# Altium PCB МПСУ.687251.22-01.PcbDoc
Units mm, origin at the board's own origin, x right, y up, seen from the top; angles counter-clockwise.
Board outline 40 x 41 mm, 2 copper layers (Top Layer, Bottom Layer), stack 2.036 mm thick; 32 components, 38 nets, 165 pads, 155 vias.
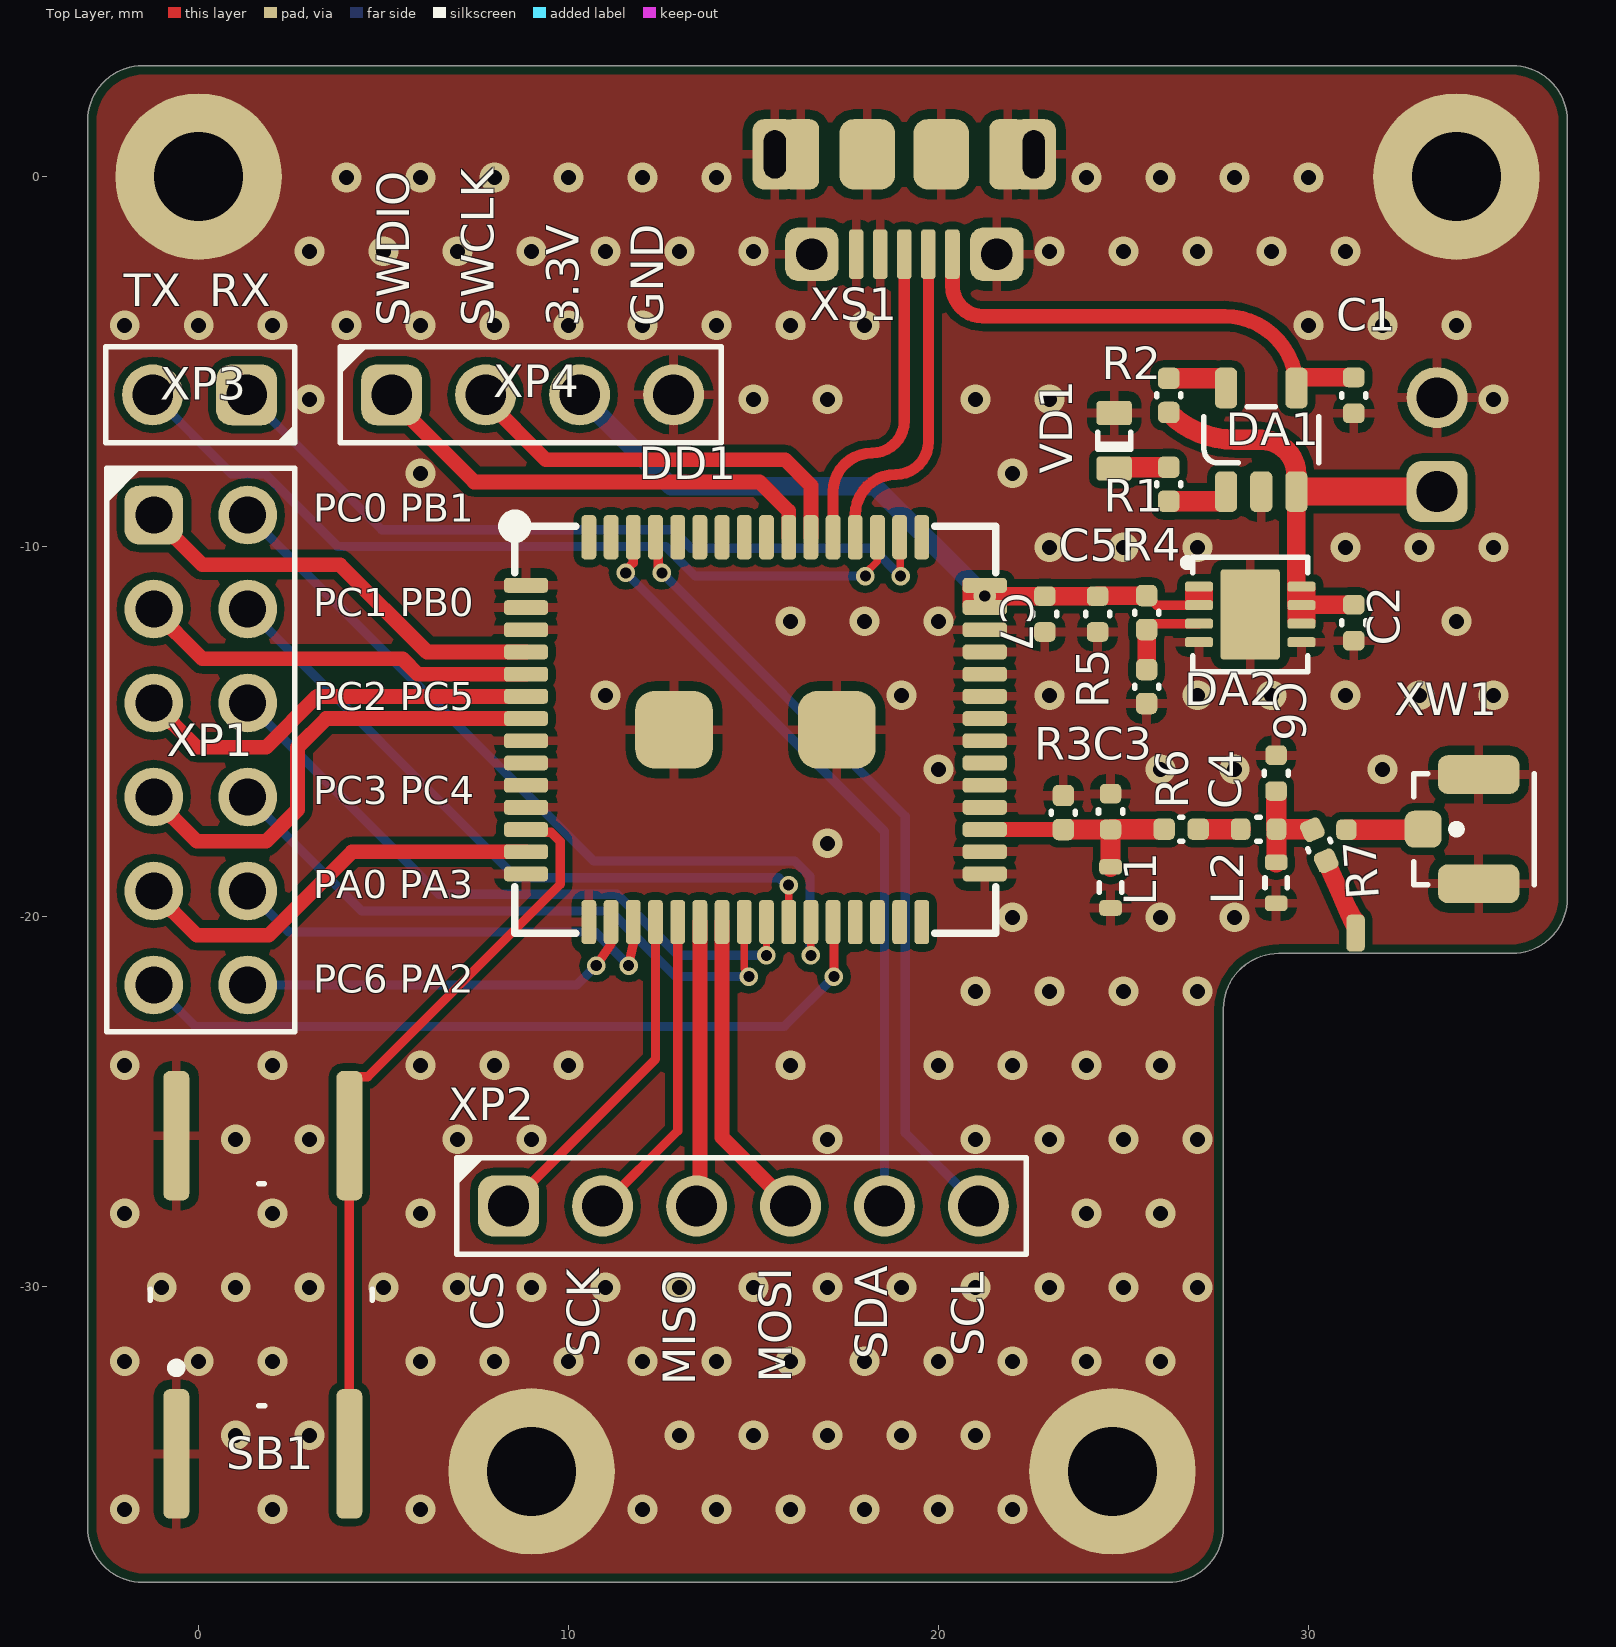
[diagram p0: Top Layer view]
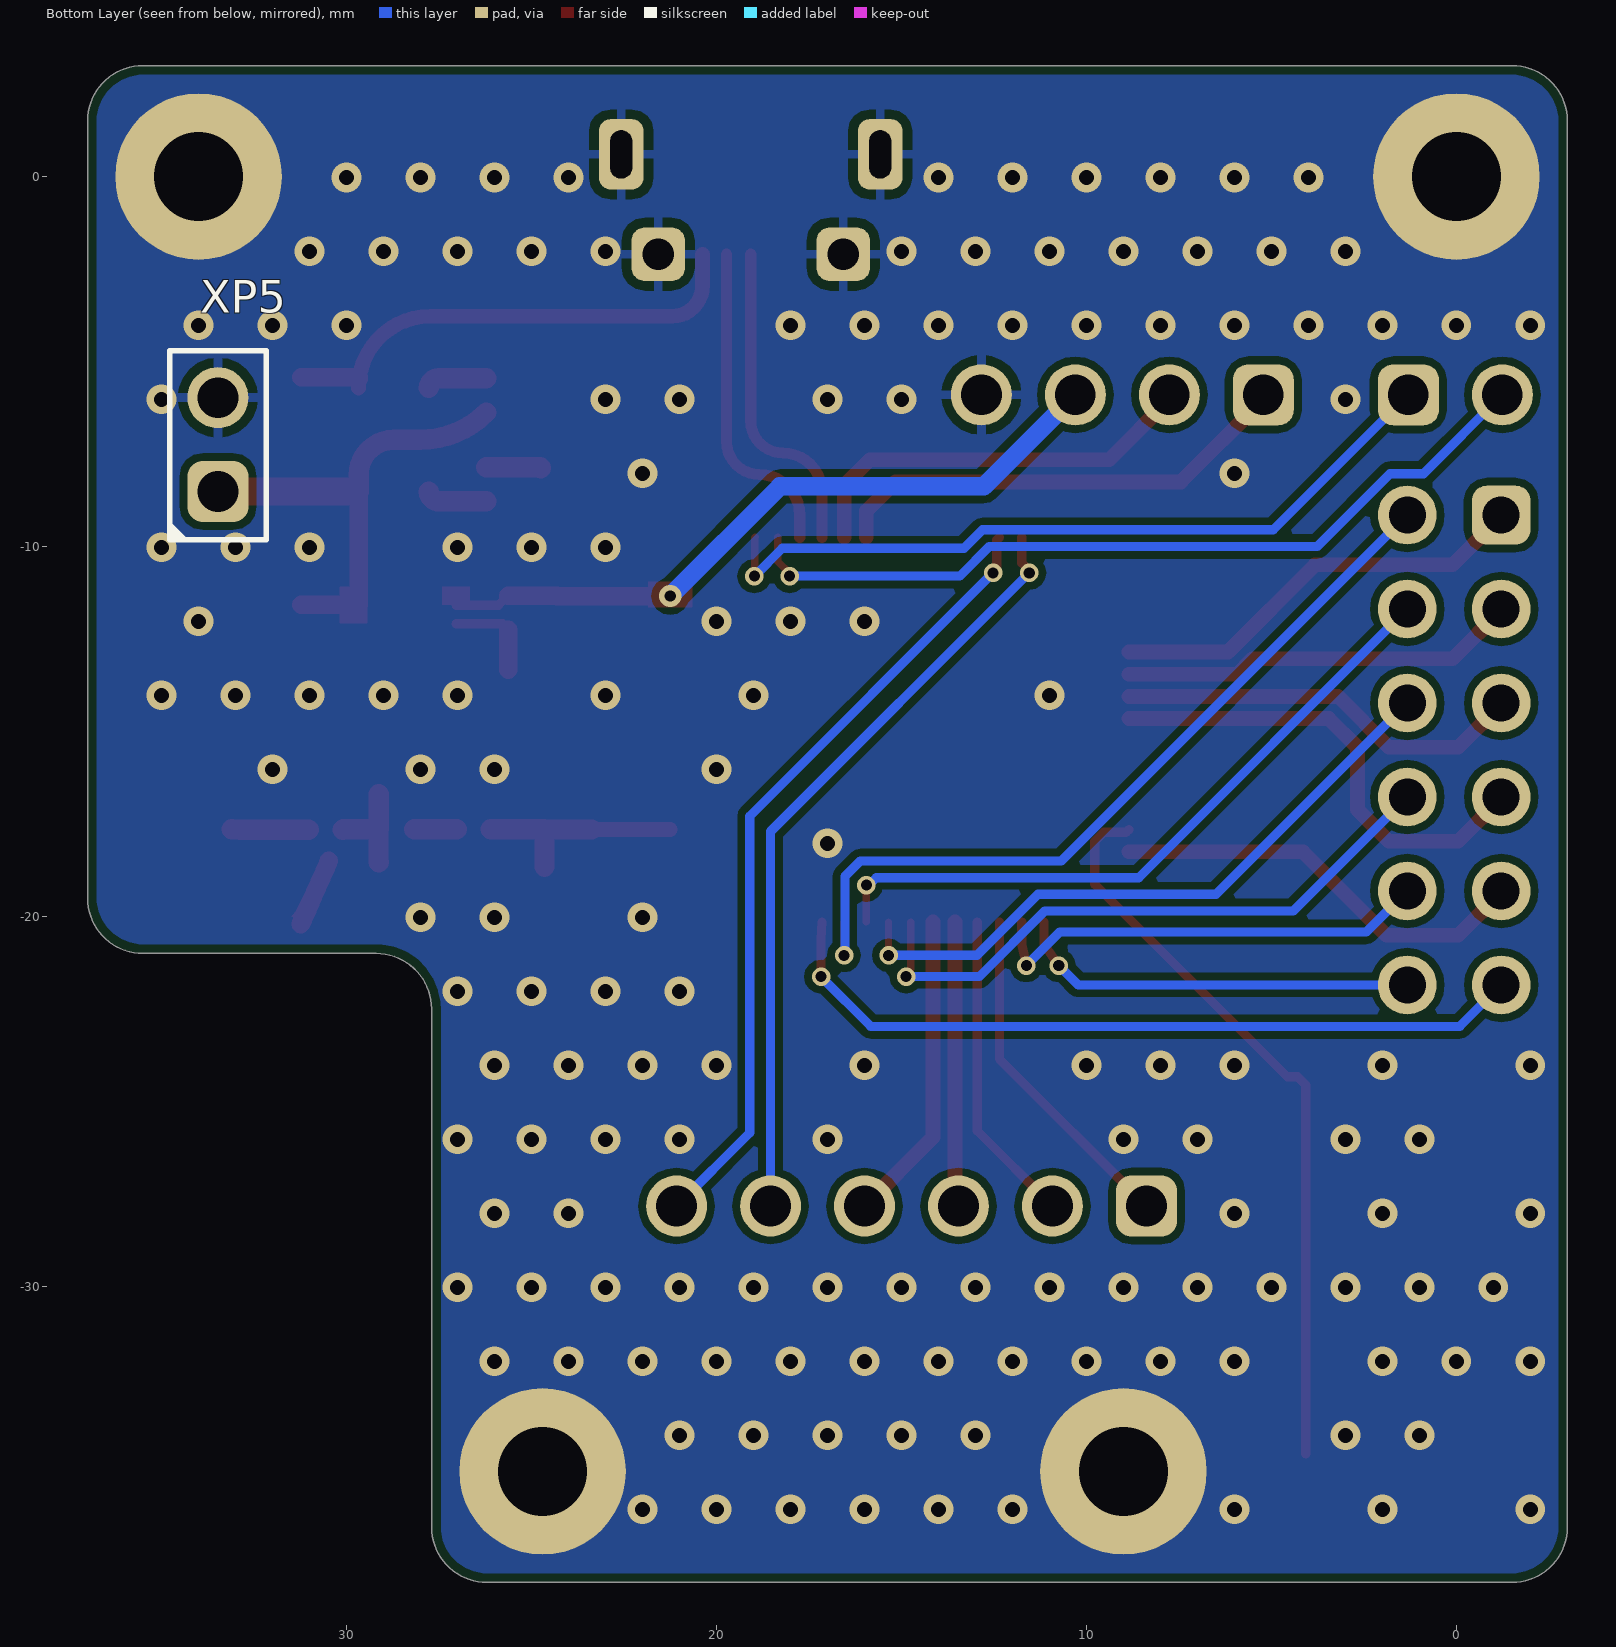
[diagram p1: Bottom Layer view, seen from below]
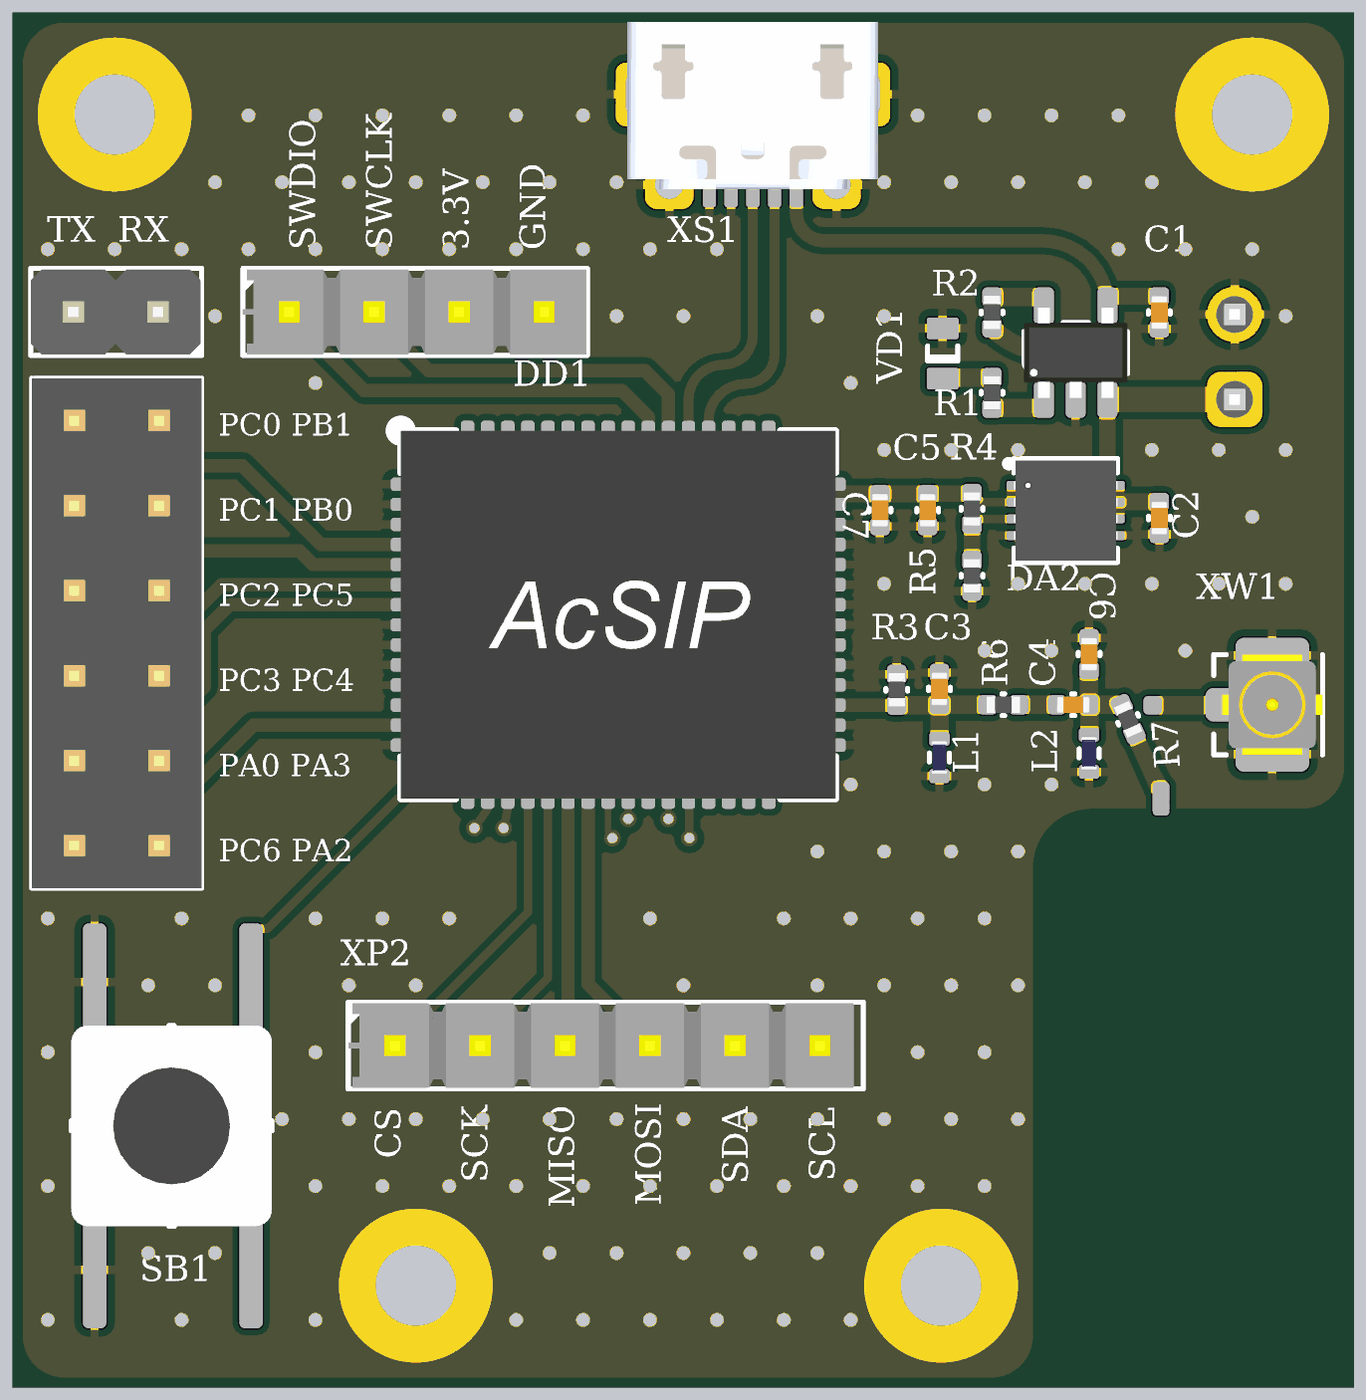
[diagram p2: 3D render of the assembled board from above, using the file's embedded part models]

## Layer stack, top to bottom
Top Solder: solder mask 0.0254, SM-002, Dk 4
Top Layer: signal copper 0.018
Dielectric 1: core 2, FR4, Dk 4.6
Bottom Layer: signal copper 0.018
Bottom Solder: solder mask 0.0254, SM-002, Dk 4

## Board outline
-1.5,-38 cw(c-1.5,-36.5) -3,-36.5 -3,1.5 cw(c-1.5,1.5) -1.5,3 35.5,3 cw(c35.5,1.5) 37,1.5 37,-19.5 cw(c35.5,-19.5) 35.5,-21 29.2,-21 ccw(c29.2,-22.5) 27.7,-22.5 27.7,-36.5 cw(c26.2,-36.5) 26.2,-38

## Design rules (kind name [scope] priority, off if disabled: settings)
BoardOutlineClearance SolderMask [OnSolderMask] p1: gap=0 ignorepadtopadclearanceinfootprint=FALSE except(0.25: Arc-CavityEdge Arc-SplitContinuation Track-CavityEdge Track-SplitContinuation SMDPad-CavityEdge SMDPad-SplitContinuation THPad-CavityEdge THPad-SplitContinuation Via-CavityEdge Via-SplitContinuation Fill-CavityEdge Fill-SplitContinuation Poly-CavityEdge Poly-SplitContinuation Region-CavityEdge Region-SplitContinuation Text-CavityEdge Text-SplitContinuation)
BoardOutlineClearance [All] p2: gap=0.25 ignorepadtopadclearanceinfootprint=FALSE
Clearance [All] p1: gap=0.2 ignorepadtopadclearanceinfootprint=FALSE
ComponentClearance [All] p1 off: gap=0.25 collisioncheckmode=3 verticalgap=0.25 showdistances=FALSE
DiffPairsRouting [All] p1: maxlimit=0.25 minlimit=0.25 mostfreqgap=0.25 toplayer_minwidth=0.2 toplayer_maxwidth=1 toplayer_prefwidth=0.4 bottomlayer_minwidth=0.2 bottomlayer_maxwidth=1 bottomlayer_prefwidth=0.4 maxuncoupledlength=10
HoleSize [All] p1: absolutevalues=TRUE maxlimit=8 minlimit=0.3 maxpercent=80.000 minpercent=20.000
HoleToHoleClearance [All] p1: gap=0.3 allowstackedmicrovias=TRUE
MinimumSolderMaskSliver [All] p1: minsoldermaskwidth=0.15
PlaneClearance [All] p1: clearance=0.5
PlaneConnect [All] p1: planeconnectstyle=Relief reliefexpansion=0.5 reliefentries=4 reliefconductorwidth=0.25 reliefairgap=0.25
PolygonConnect [All] p1: thpad.connectstyle=Relief thpad.reliefconductorwidth=0.25 thpad.reliefentries=4 thpad.polygonreliefangle="90 Angle" thpad.airgapwidth=0.25 smdpad.connectstyle=Relief smdpad.reliefconductorwidth=0.25 smdpad.reliefentries=4 smdpad.polygonreliefangle="90 Angle" smdpad.airgapwidth=0.25 via.connectstyle=Direct via.reliefconductorwidth=0.25 via.reliefentries=4 via.polygonreliefangle="90 Angle" via.airgapwidth=0.25
ReturnPath [All] p1: impedanceprofileid={2CF304FD-49DA-4276-8468-CD12DB598121} _gaplimit=0.5
RoutingCorners [All] p1: cornerstyle=45-Degree minsetback=2.5 maxsetback=2.5
RoutingVias [All] p1: holewidth=0.3 width=0.5 viastyle="Through Hole" minholewidth=0.3 minwidth=0.5 maxholewidth=1 maxwidth=1.5
SilkToSilkClearance [All] p1: silktosilkclearance=0.05
SilkToSolderMaskClearance [IsPad] p1: minsilkscreentomaskgap=0.05 clearancetoexposedcopper=TRUE
SolderMaskExpansion [All] p1: expansion=0.05 istentingtop=FALSE
UnRoutedNet [All] p1: checkbadconnections=TRUE
Width [All] p1: maxlimit=3 minlimit=0.2 preferedwidth=0.25
19 further rules are at their usual default settings.

## Classes and differential pairs
component class "МПСУ.464414.22-01 Sheet1": C1 C2 C3 C4 C5 C6 C7 DA1 DA2 DD1 L1 L2 R1 R2 R3 R4 R5 R6 R7 SB1 VD1 XP1 XP2 XP3 XP4 XP5 XS1 XW1

## Components (designator, comment, footprint, x,y, rotation, side; value= is the part's Value field where it differs from the comment)
C1 "100 мкФ ± 0 % 0 В  0402" CAPC100X50X55L20N 31.224,-5.916 r90 top value="100 мкФ"
C2 "100 мкФ ± 0 % 0 В  0402" CAPC100X50X55L20N 31.225,-12.06 r270 top value="100 мкФ"
C3 "TBD ± 0 % 0 В  0402" CAPC100X50X55L20N 24.65,-17.165 r90 top value=TBD
C4 "56мкФ ± 0 % 0 В  0402" CAPC100X50X55L20N 28.65,-17.64 r180 top value=56мкФ
C5 "100 мкФ ± 0 % 0 В  0402" CAPC100X50X55L20N 24.3,-11.825 r90 top value="100 мкФ"
C6 "TBD ± 0 % 0 В  0402" CAPC100X50X55L20N 29.125,-16.125 r90 top value=TBD
C7 "0.1 мкФ ± 0 % 0 В  0402" CAPC100X50X55L20N 22.875,-11.825 r270 top value="0.1 мкФ"
DA1 "MCP73831T-2ACI/OT" SOTFL95P270X145-5N 28.724,-7.116 r90 top
DA2 "LT1965*DD" SON9P50_300X300X80L40X25T244X160N 28.425,-11.835 r270 top
DD1 "" S7XS 15.05,-14.95 r0 top
L1 "TBD ± 0 % 0 А 0402" INDC100X50X60L10N 24.65,-19.215 r270 top value=TBD
L2 "TBD ± 0 % 0 А 0402" INDC100X50X60L10N 29.125,-19.09 r270 top value=TBD
R1 "470 Ом ± 0 % 0 Вт 0402" RESC100X50X40L25N 26.224,-8.316 r90 top value="470 Ом"
R2 "5 кОм ± 0 % 0 Вт 0402" RESC100X50X40L25N 26.224,-5.916 r270 top value="5 кОм"
R3 "0 Ом ± 0 % 0 Вт 0402" RESC100X50X40L25N 23.375,-17.19 r90 top value="0 Ом"
R4 "4,42 кОм ± 0 % 0 Вт 0402" RESC100X50X40L25N 25.625,-11.785 r270 top value="4,42 кОм"
R5 "3,01 кОм ± 0 % 0 Вт 0402" RESC100X50X40L25N 25.625,-13.785 r270 top value="3,01 кОм"
R6 "0 Ом ± 0 % 0 Вт 0402" RESC100X50X40L25N 26.56,-17.64 r0 top value="0 Ом"
R7 "0 Ом ± 0 % 0 Вт 0402" RESC100X50X40L25N 30.292,-18.075 r294 top value="0 Ом"
SB1 "" KLS7-TS6601 1.7,-30.225 r90 top
VD1 "KP-1608ZGC" KP-1608ZGC 24.749,-7.141 r90 top
XP1 "DS1021-2x6SF11-B" HDRV12W64P254_6X2_1524X508H600 0.06,-15.5 r270 top
XP2 "TSW-106-07-G-S" TSW-106-07-G-S 16,-27.825 r0 top
XP3 "TSW-102-07-G-S" TSW-102-07-G-S 1.3,-5.9 r180 top
XP4 "TSW-104-07-G-S" TSW-104-07-G-S 9.03,-5.9 r0 top
XP5 "TSW-102-07-G-S" TSW-102-07-G-S 33.475,-8.515 r90 bottom
XS1 "10118194-0001LF" micro_USB_TH 19.075,0 r180 top
XW1 "U.FL-LP1" U.FL-LP 34.6,-17.64 r270 top
? "Comment" M2_Hole#1 24,-34.625 r0 top
? "Comment" M2_Hole#2 33.6,-0.025 r0 top
? "Comment" M2_Hole#3 -0.15,0.125 r0 top
? "Comment" M2_Hole#4 8.375,-34.625 r0 top

## Footprints (in the part's own frame and the unit in brackets; to place one, negate y for a bottom-side part, rotate by r counter-clockwise, add the part's x,y. Pads: shape width x height; smd on the part's side, far side on the other; paste and mask are expansions set on the pad)
CAPC100X50X55L20N [mm] "Capacitor, Chip; 1.00 mm L X 0.50 mm W X 0.55 mm H body"
  rrect50% 0.53x0.58 smd: 1(-0.485,0) 2(0.485,0)
  silkscreen extent -0.05,-0.33 0.05,0.33, body extent -0.5,-0.25 0.5,0.25, height 0.55
HDRV12W64P254_6X2_1524X508H600 [mm] "Header, Vertical, 2.54 mm pitch; 0.64 mm lead width, 12 pins, 2 rows, 6 pins per row, 15.24 mm L X 5.08 mm W X 6.00 mm H body"
  rrect50% 1.59x1.59 hole 1: 1(-6.35,-1.27)
  round 1.59 hole 1: 2(-6.35,1.27) 3(-3.81,-1.27) 4(-3.81,1.27) 5(-1.27,-1.27) 6(-1.27,1.27) 7(1.27,-1.27) 8(1.27,1.27) 9(3.81,-1.27) 10(3.81,1.27) 11(6.35,-1.27) 12(6.35,1.27)
  silkscreen extent -7.62,-2.54 7.62,2.54, body extent -7.62,-2.54 7.62,2.54, height 6
INDC100X50X60L10N [mm] "Inductor, Chip; 1.00 mm L X 0.50 mm W X 0.60 mm H body"
  rrect50% 0.42x0.61 smd: 1(-0.555,0) 2(0.555,0)
  silkscreen extent -0.13,-0.3 0.13,0.3, body extent -0.5,-0.25 0.5,0.25, height 0.6
KLS7-TS6601 [mm] "Button"
  rrect50% 3.5x0.7 smd: 1(-4.3,2.3) 1(4.3,2.3) 2(-4.3,-2.376) 2(4.3,-2.376)
  silkscreen extent -3,-3 3,3, body extent -3,-3 3,3, height 13
KP-1608ZGC [mm] "SODFL, 2-Leads, Body 0,80x1,60mm, IPC Medium Density"
  rrect25% 0.65x0.95 smd: 1(-0.75,0) 2(0.75,0)
  silkscreen extent -0.3,-0.45 0.23,0.45, body extent -0.8,-0.37 0.8,0.38, height 1.1
M2_Hole#1 [mm]
  round 4.5 / inner round 3.4 / far side round 4.5 hole 2.4: 1(0.7,-0.375)
  body extent -1.2,-2.28 2.6,1.52, height 1.3
M2_Hole#2 [mm]
  round 4.5 / inner round 3.4 / far side round 4.5 hole 2.4: 1(0.4,0.025)
  body extent -1.5,-1.88 2.3,1.92, height 1.3
M2_Hole#3 [mm]
  round 4.5 / inner round 3.4 / far side round 4.5 hole 2.4: 1(0.15,-0.125)
  body extent -1.75,-2.03 2.05,1.77, height 1.3
M2_Hole#4 [mm]
  round 4.5 / inner round 3.4 / far side round 4.5 hole 2.4: 1(0.625,-0.375)
  body extent -1.28,-2.28 2.52,1.52, height 1.3
micro_USB_TH [mm]
  rrect50% 0.4x1.35 smd: 1(-1.3,2.1) 2(-0.65,2.1) 3(0,2.1) 4(0.65,2.1) 5(1.3,2.1)
  rrect50% 1.2x1.9 hole 1.3 slot 0.6 at 0 deg: 5(-3.5,-0.6) 5(3.5,-0.6)
  rrect50% 1x1.9 smd: 5(-2.8,-0.6) 5(2.8,-0.6)
  rrect50% 1.45x1.45 hole 0.85: 5(-2.5,2.1) 5(2.5,2.1)
  rrect50% 1.5x1.9 smd: 5(-1,-0.6) 5(1,-0.6)
  body extent -3.75,-2.77 3.75,2.24, height 2.64
RESC100X50X40L25N [mm] "Resistor, Chip; 1.00 mm L X 0.50 mm W X 0.40 mm H body"
  rrect50% 0.58x0.58 smd: 1(-0.46,0) 2(0.46,0)
  silkscreen extent -0.04,-0.33 0.04,0.33, body extent -0.5,-0.25 0.5,0.25, height 0.4
S7XS [mm] "S7XS"
  rrect50% 1.2x0.4 smd mask-0.05: 1(-6.2,3.9) 2(-6.2,3.3) 3(-6.2,2.7) 4(-6.2,2.1) 5(-6.2,1.5) 6(-6.2,0.9) 7(-6.2,0.3) 8(-6.2,-0.3) 9(-6.2,-0.9) 10(-6.2,-1.5) 11(-6.2,-2.1) 12(-6.2,-2.7) 13(-6.2,-3.3) 14(-6.2,-3.9) 31(6.2,-3.9) 32(6.2,-3.3) 33(6.2,-2.7) 34(6.2,-2.1) 35(6.2,-1.5) 36(6.2,-0.9) 37(6.2,-0.3) 38(6.2,0.3) 39(6.2,0.9) 40(6.2,1.5) 41(6.2,2.1) 42(6.2,2.7) 43(6.2,3.3) 44(6.2,3.9)
  rrect50% 0.4x1.2 smd mask-0.05: 15(-4.5,-5.2) 16(-3.9,-5.2) 17(-3.3,-5.2) 18(-2.7,-5.2) 19(-2.1,-5.2) 20(-1.5,-5.2) 21(-0.9,-5.2) 22(-0.3,-5.2) 23(0.3,-5.2) 24(0.9,-5.2) 25(1.5,-5.2) 26(2.1,-5.2) 27(2.7,-5.2) 28(3.3,-5.2) 29(3.9,-5.2) 30(4.5,-5.2) 45(4.5,5.2) 46(3.9,5.2) 47(3.3,5.2) 48(2.7,5.2) 49(2.1,5.2) 50(1.5,5.2) 51(0.9,5.2) 52(0.3,5.2) 53(-0.3,5.2) 54(-0.9,5.2) 55(-1.5,5.2) 56(-2.1,5.2) 57(-2.7,5.2) 58(-3.3,5.2) 59(-3.9,5.2) 60(-4.5,5.2)
  rrect50% 2.1x2.1 smd mask-0.05: 61(-2.2,0) 62(2.2,0)
  silkscreen extent -6.7,-5.5 6.5,5.7, body extent -6.5,-5.5 6.5,5.5, height 1.14
SON9P50_300X300X80L40X25T244X160N [mm] "Small Outline No-Lead (SON with Tab), 0.50 mm pitch; 8 pin, 3.00 mm L X 3.00 mm W X 0.80 mm H body"
  rrect50% 0.27x0.76 smd: 1(-0.75,-1.385) 2(-0.25,-1.385) 3(0.25,-1.385) 4(0.75,-1.385) 5(0.75,1.385) 6(0.25,1.385) 7(-0.25,1.385) 8(-0.75,1.385)
  rrect10% 2.44x1.6 smd: 9(0,0)
  silkscreen extent -1.55,-1.78 1.55,1.55, body extent -1.5,-1.55 1.5,1.55, height 0.8
SOTFL95P270X145-5N [mm] "SOTFL, 5-Leads, Body 2,90x2,70mm, Pitch 0,95mm, IPC Medium Density"
  rrect50% 1.1x0.6 smd: 1(-1.4,0.95) 2(-1.4,0) 3(-1.4,-0.95) 4(1.4,-0.95) 5(1.4,0.95)
  silkscreen extent -0.63,-1.55 0.9,1.55, body extent -1.35,-1.55 1.35,1.55, height 1.45
TSW-102-07-G-S [mm]
  rrect50% 1.65x1.65 hole 1.1: 1(0,0)
  round 1.65 hole 1.1: 2(2.54,0)
  silkscreen extent -1.3,-1.3 3.81,1.3, body extent -1.27,-1.27 3.81,1.27, height 8.38
TSW-104-07-G-S [mm]
  rrect50% 1.65x1.65 hole 1.1: 1(-3.81,0)
  round 1.65 hole 1.1: 2(-1.27,0) 3(1.27,0) 4(3.81,0)
  silkscreen extent -5.2,-1.3 5.1,1.3, body extent -5.21,-1.27 5.08,1.27, height 8.38
TSW-106-07-G-S [mm]
  rrect50% 1.65x1.65 hole 1.1: 1(-7.62,0)
  round 1.65 hole 1.1: 2(-5.08,0) 3(-2.54,0) 4(0,0) 5(2.54,0) 6(5.08,0)
  silkscreen extent -9.02,-1.3 6.38,1.3, body extent -9.02,-1.27 6.1,1.27, height 8.38
U.FL-LP [mm]
  rrect50% 1x1 smd: 1(0,-1.5)
  rrect50% 1.05x2.2 smd: 2(-1.475,0) 2(1.475,0)
  silkscreen extent -1.5,-1.75 1.5,1.5, body extent -1.5,-1.5 1.5,1.5, height 1.25

## Part data
C1 C2 C3 C4 C5 C6 C7: library part "C 0402", "Capacitor 0402", Package=0402, Tolerance="0 %", 3D_Body=+, Category=Passive, Designer=Свидерский, Peak_Condition="0 В", Status=Approved, Subcategory=Capacitor
DA1: library part MCP7383*, "Miniature Single-Cell, Fully Integrated Li-Ion, / Li-Polymer Charge Management Controllers", Manufacturer=Microchip, 3D_Body=+, Category=IC, ComponentLink1Description="Техническое описание", ComponentLink1URL=Q:\Libs\Descriptions_PDF\MCP73831-2.pdf, Designer=Лазба, PartNumber=MCP73831T-2ACI/OT, Status=Check, Subcategory="Power Supply"
DA2: "1.1A, Low Noise,  Low Dropout Linear Regulator", Manufacturer="Analog Devices", Package="8-LEAD (3mm × 3mm) PLASTIC DFN", 3D_Body=+, Category=IC, ComponentLink1Description="Техническое описание", ComponentLink1URL=Q:\Libs\Descriptions_PDF\LT1965.pdf, Designer=Свидерский, PartNumber=LT1965*DD, Status=Approved, Subcategory="Power Supply"
DD1: library part S76S, "The S76S is designed & manufactured in a smallest form factor - SiP ( System in Package ). It integrate with Semtech SX1276 and a 32-bit ultra low power Cortex M0L MCU ( STM32L073x ), supporting global 863MHz ~ 928MHz ISM-Bands.", Manufacturer=AcSIP, 3D_Body=+, Category=IC, ComponentLink1Description="Техническое описание", ComponentLink1URL="Q:\Libs\Descriptions_PDF\AcSIP S76S.pdf", Designer=Лазба, PartNumber=S76S, Status=Check, Subcategory=MCU
L1 L2: library part "L 0402", "Inductor 0402", Package=0402, Tolerance="0 %", 3D_Body=+, Category=Passive, Designer=Свидерский, Peak_Condition="0 А", Status=Approved, Subcategory=Inductor
R1 R2 R3 R4 R5 R6 R7: library part "R 0402", "Resistor 0402", Package=0402, Tolerance="0 %", 3D_Body=+, Category=Passive, Designer=Свидерский, Peak_Condition="0 Вт", Status=Approved, Subcategory=Resistor
SB1: library part KLS7-TS6601*, "6x6 Tact Switch Series", Manufacturer="KLS electronic co ltd", PartNumber=KLS7-TS6601-13-180, 3D_Body=+, Category=Passive, ComponentLink1Description="Техническое описание", ComponentLink1URL=Q:\Libs\Descriptions_PDF\KLS7-TS6601.pdf, Designer=Лазба, Status=Check, Subcategory=Button
VD1: library part KP-1608***, "1.6X0.8mm SMD CHIP LED LAMP", Manufacturer=Kingbright, Package="1.6mmX0.8mm SMD LED", 3D_Body=+, Category=Discrete, ComponentLink1Description="Техническое описание", ComponentLink1URL=Q:\Libs\Descriptions_PDF\KP-1608ZGC.pdf, Designer=Ушакова, PartNumber=KP-1608ZGC, Status=Approved, Subcategory=Diode
XP1: "Вилка 2,54мм", Manufacturer="Connfly Electronic", 3D_Body=+, Category=Connector, ComponentLink1Description="Техническое описание", ComponentLink1URL=Q:\Libs\Descriptions_PDF\DS1021.pdf, Designer=Свидерский, PartNumber=DS1021-2x6SF11-B, Pins=2x6, Pitch=2.54mm, Status=Approved, Subcategory=Male, System=Connector
XP2 XP4: "Вилка 2,54 мм", Manufacturer=Samtec, 3D_Body=+, Category=Connector, ComponentLink1Description="Техническое описание", ComponentLink1URL=Q:\Libs\Descriptions_PDF\tsw_th.pdf, Pitch=2.54mm, Status=Check, Subcategory=Male, System=Connector
  XP2: Designer=Лазба, PartNumber=TSW-106-07-G-S, Pins=1x6
  XP4: Designer=Затонская, PartNumber=TSW-104-07-G-S, Pins=1x4
XP3 XP5: "2x1 Вилка 2,54 мм", Manufacturer=Samtec, 3D_Body=+, Category=Connector, ComponentLink1Description="Техническое описание", ComponentLink1URL=Q:\Libs\Descriptions_PDF\tsw_th.pdf, Designer=Погорельский, PartNumber=TSW-102-07-G-S, Pins=2х1, Pitch=2.54mm, Status=Check, Subcategory=Male, System=Connector
XS1: "micro USB, Through Hole Mount", Manufacturer="Amphenal ICC", 3D_Body=+, Category=Connector, ComponentLink1Description="Техническое описание", ComponentLink1URL=Q:\Libs\Descriptions_PDF\10118194-0001LF.pdf, Designer=Свидерский, PartNumber=10118194-0001LF, Pins=5, Pitch=-, Status=Approved, Subcategory=microUSB, System=Connector
XW1: library part U.FL-R-SMT, "RF connector, Right Angle Jack PCB SMA Female End Launch Connector", Manufacturer="Hirose Electric", 3D_Body=+, Category=Connector, ComponentLink1Description="Техническое описание", ComponentLink1URL=Q:\Libs\Descriptions_PDF\U.FL-R-SMT(01).pdf, Designer=Лазба, PartNumber=U.FL-LP1, Pins=UFL, Status=Check, Subcategory=RF, System=Connector

## Free pads (board coordinates)
  rrect50% 0.55x0.55 smd: 1(31.025,-17.655)
  rrect50% 0.5x0.5 smd: 7(31.275,-20.7) 7(31.275,-20.45) 7(31.275,-20.375) 7(31.275,-20.2)

## Via types
v1: diameter 0.8, hole 0.4, Top Layer to Bottom Layer, tented both sides, 143 vias
v2: diameter 0.5, hole 0.3, Top Layer to Bottom Layer, tented both sides, 11 vias
v3: diameter 0.6, hole 0.3, Top Layer to Bottom Layer, tented both sides, 1 vias

## Nets (pads, with @x,y where several pads share a name; then routed paths per layer and width w, separated by ;. In a path a pad name is that pad's centre, name@x,y a point inside that pad or via, vN(x,y) a via of type N, cw(c..) or ccw(c..) an arc to the next point about the centre after c; other vN are vias at no path point)
ACC_V: C2.1 DA1.3 DA2.6 DA2.7 DA2.8 R2.2 XP5.1 | length 12.6
  Top Layer w0.2: DA2.7 DA2.7@29.815,-11.58 ; C2.1@31.22,-11.58 C2.1
  Top Layer w0.5: DA1.3 29.674,-10.382 29.675,-10.383 DA2.7@29.675,-11.585 ; DA2.7@29.815,-11.58 C2.1@31.22,-11.58
  Top Layer w0.55: R2.2 ccw(c28.01,-4.59) 28.01,-7.116 28.724,-7.116 cw(c28.724,-8.066) 29.674,-8.066 DA1.3
  Top Layer w0.75: 29.974,-8.515 XP5.1
GND: ?.1 C1.1 C2.2 C3.2 C5.1 C6.2 C7.2 DA1.2 DA2.4 DA2.5 DA2.9 DD1.1 DD1.2 DD1.3 DD1.8 DD1.9 DD1.10 DD1.11 DD1.14 DD1.15 DD1.31 DD1.32 DD1.34 DD1.35 DD1.37 DD1.38 DD1.39 DD1.40 DD1.41 DD1.42 DD1.61 DD1.62 L1.2 L2.2 R3.2 R5.2 SB1.1 VD1.2 XP4.4 XP5.2 XS1.4 XS1.5 XW1.2
  other v1: -2,-36.025 2,-36.025 6,-36.025 12,-36.025 14,-36.025 16,-36.025 18,-36.025 20,-36.025 22,-36.025 1,-34.025 3,-34.025 13,-34.025 15,-34.025 17,-34.025 19,-34.025 21,-34.025 -2,-32.025 0,-32.025 2,-32.025 6,-32.025 8,-32.025 10,-32.025 12,-32.025 14,-32.025 16,-32.025 18,-32.025 20,-32.025 22,-32.025 24,-32.025 26,-32.025 -1,-30.025 1,-30.025 3,-30.025 5,-30.025 7,-30.025 9,-30.025 11,-30.025 13,-30.025 15,-30.025 17,-30.025 19,-30.025 21,-30.025 23,-30.025 25,-30.025 27,-30.025 -2,-28.025 2,-28.025 6,-28.025 24,-28.025 26,-28.025 1,-26.025 3,-26.025 7,-26.025 9,-26.025 17,-26.025 21,-26.025 23,-26.025 25,-26.025 27,-26.025 -2,-24.025 2,-24.025 6,-24.025 8,-24.025 10,-24.025 16,-24.025 20,-24.025 22,-24.025 24,-24.025 26,-24.025 21,-22.025 23,-22.025 25,-22.025 27,-22.025 22,-20.025 26,-20.025 28,-20.025 17,-18.025 20,-16.025 26,-16.025 28,-16.025 32,-16.025 11,-14.025 19,-14.025 23,-14.025 27,-14.025 29,-14.025 31,-14.025 33,-14.025 35,-14.025 16,-12.025 18,-12.025 20,-12.025 34,-12.025 23,-10.025 25,-10.025 27,-10.025 31,-10.025 33,-10.025 35,-10.025 6,-8.025 22,-8.025 3,-6.025 15,-6.025 17,-6.025 21,-6.025 23,-6.025 35,-6.025 -2,-4.025 0,-4.025 2,-4.025 4,-4.025 6,-4.025 8,-4.025 10,-4.025 12,-4.025 14,-4.025 16,-4.025 18,-4.025 30,-4.025 32,-4.025 34,-4.025 3,-2.025 5,-2.025 7,-2.025 9,-2.025 11,-2.025 13,-2.025 15,-2.025 23,-2.025 25,-2.025 27,-2.025 29,-2.025 31,-2.025 4,-0.025 6,-0.025 8,-0.025 10,-0.025 12,-0.025 14,-0.025 24,-0.025 26,-0.025 28,-0.025 30,-0.025
NetC1_2: C1.2 DA1.4 XS1.1 | length 13.6
  Top Layer w0.4: XS1.1 20.375,-2.95 ccw(c21.2,-2.95) 21.2,-3.775 27.733,-3.775 cw(c27.733,-5.716) DA1.4 DA1.4@29.674,-5.466
  Top Layer w0.5: DA1.4@29.674,-5.466 29.674,-5.431 C1.2
NetC3_1: C3.1 DD1.33 L1.1 R3.1 R6.1 | length 5.9
  Top Layer w0.4: DD1.33 R3.1
  Top Layer w0.55: R3.1 C3.1 L1.1 ; C3.1@24.65,-17.64 R6.1
NetC4_1: C4.1 C6.1 L2.1 R7.1 | length 2.8
  Top Layer w0.55: L2.1 29.135,-18.535 C4.1 ; C6.1@29.125,-16.7 29.125,-17.64 C4.1 ; R7.1 30.09,-17.64 C4.1
NetC4_2: C4.2 R6.2 | length 1.1
  Top Layer w0.55: R6.2 C4.2
NetDA1_1: DA1.1 R1.1 | length 1.7
  Top Layer w0.55: R1.1 27.514,-8.776 ccw(c27.514,-8.516) DA1.1
NetDA1_5: DA1.5 R2.1 | length 1.7
  Top Layer w0.55: R2.1 27.514,-5.456 cw(c27.514,-5.716) DA1.5
NetDA2_3: DA2.3 R4.2 R5.1 | length 2.6
  Top Layer w0.25: R4.2 25.785,-12.085 DA2.3
  Top Layer w0.5: R5.1 R4.2
NetDD1_4: DD1.4 XP1.1 | length 11.6
  Top Layer w0.4: XP1.1@-1.245,-9.15 0.1,-10.495 3.82,-10.495 6.175,-12.85 DD1.4
NetDD1_5: DD1.5 XP1.3 | length 10.8
  Top Layer w0.4: XP1.3@-1.245,-11.69 0.1,-13.035 5.511,-13.035 5.926,-13.45 DD1.5
NetDD1_6: DD1.6 XP1.5 | length 11.2
  Top Layer w0.4: XP1.5@-1.245,-14.23 -0.05,-15.425 1.825,-15.425 3.2,-14.05 8.391,-14.05 8.601,-14.05 DD1.6
NetDD1_7: DD1.7 XP1.7 | length 13
  Top Layer w0.4: XP1.7@-1.245,-16.77 -0.05,-17.965 1.825,-17.965 2.675,-17.115 2.675,-15.424 3.449,-14.65 DD1.7
NetDD1_12: DD1.12 SB1.2 | length 20.1
  Top Layer w0.25: SB1.2@4.076,-34.525 4.076,-25.925 4.076,-24.552 4.297,-24.331 4.57,-24.331 9.775,-19.126 9.775,-17.974 9.526,-17.725 8.925,-17.725 DD1.12
NetDD1_13: DD1.13 XP1.9 | length 11.5
  Top Layer w0.4: XP1.9@-1.245,-19.31 -0.05,-20.505 1.895,-20.505 4.15,-18.25 DD1.13
NetDD1_18: DD1.18 XP2.1 | length 9.3
  Top Layer w0.25: XP2.1 12.35,-23.855 DD1.18
NetDD1_19: DD1.19 XP2.2 | length 8.5
  Top Layer w0.25: XP2.2 12.95,-25.795 DD1.19
NetDD1_20: DD1.20 XP2.3 | length 7.7
  Top Layer w0.4: XP2.3 13.55,-27.735 DD1.20
NetDD1_21: DD1.21 XP2.4 | length 8.4
  Top Layer w0.4: DD1.21 14.15,-20.609 14.15,-25.975 XP2.4
NetDD1_46: DD1.46 XP3.1 | length 20.8
  Top Layer w0.2: DD1.46 18.962,-9.763 18.962,-10.787 v2(18.975,-10.8)
  Bottom Layer w0.25: XP3.1 4.95,-9.55 12.812,-9.55 13.312,-10.05 18.225,-10.05 v2(18.975,-10.8)
NetDD1_47: DD1.47 XP3.2 | length 22.5
  Top Layer w0.2: v2(18.025,-10.8) 18.025,-10.719 18.35,-10.394 DD1.47
  Bottom Layer w0.25: XP3.2 0.89,-8.03 1.794,-8.03 3.764,-10 12.626,-10 13.426,-10.8 v2(18.025,-10.8)
NetDD1_57: DD1.57 XP2.6 | length 21.7
  Top Layer w0.25: DD1.57 12.425,-9.825 12.425,-10.545 12.525,-10.645 v2(12.525,-10.713)
  Bottom Layer w0.25: v2(12.525,-10.713) 19.1,-17.288 19.1,-25.845 XP2.6
NetDD1_58: DD1.58 XP2.5 | length 21.1
  Top Layer w0.25: v2(11.547,-10.713) 11.547,-10.645 11.75,-10.442 DD1.58
  Bottom Layer w0.25: v2(11.547,-10.713) 18.54,-17.705 XP2.5
NetR1_2: R1.2 VD1.1 | length 1.5
  Top Layer w0.55: VD1.1 cw(c24.784,-7.891) 24.784,-7.856 R1.2
NetR7_2: pad.7 R7.2 | length 1.9
  Top Layer w0.5: R7.2 30.492,-18.533 pad.7@31.241,-20.215
NetX1_1: pad.1 XW1.1 | length 2.1
  Top Layer w0.55: pad.1 32.875,-17.655 XW1.1
PA2: DD1.16 XP1.12 | length 10.9
  Top Layer w0.25: v2(10.75,-21.325) 11.105,-20.814 ccw(c10.9,-20.672) 11.15,-20.672 11.15,-20.625 DD1.16
  Bottom Layer w0.25: XP1.12 10.225,-21.85 v2(10.75,-21.325)
PA3: DD1.17 XP1.10 | length 12.3
  Top Layer w0.25: v2(11.625,-21.325) 11.744,-20.776 ccw(c11.5,-20.723) 11.75,-20.723 11.75,-20.625 DD1.17
  Bottom Layer w0.25: XP1.10 2.44,-20.42 10.72,-20.42 v2(11.625,-21.325)
PB0: DD1.24 XP1.4 | length 18.7
  Top Layer w0.2: DD1.24 v2(15.95,-19.15)
  Bottom Layer w0.25: XP1.4 8.59,-18.95 15.682,-18.95 15.882,-19.15 v2(15.95,-19.15)
PB1: DD1.25 XP1.2 | length 22.3
  Top Layer w0.2: v2(16.55,-21.05) DD1.25
  Bottom Layer w0.25: XP1.2 10.68,-18.5 16.113,-18.5 16.525,-18.912 16.525,-21.025 v2(16.55,-21.05)
PC4: DD1.22 XP1.8 | length 17.1
  Top Layer w0.2: DD1.22 14.75,-21.419 14.875,-21.544 v2(14.875,-21.625)
  Bottom Layer w0.25: XP1.8 4.41,-19.85 11.125,-19.85 12.9,-21.625 v2(14.875,-21.625)
PC5: DD1.23 XP1.6 | length 17.7
  Top Layer w0.2: v2(15.35,-21.05) DD1.23
  Bottom Layer w0.25: XP1.6 6.5,-19.4 11.311,-19.4 12.961,-21.05 v2(15.35,-21.05)
PC6: DD1.26 XP1.11 | length 20.9
  Top Layer w0.25: DD1.26 17.175,-20.625 v2(17.175,-21.625)
  Bottom Layer w0.25: XP1.11 -0.09,-22.97 15.83,-22.97 v2(17.175,-21.625)
SWCLK: DD1.50 XP4.2 | length 11.2
  Top Layer w0.4: XP4.2@7.76,-6.025 9.389,-7.654 15.854,-7.654 16.55,-8.35 DD1.50
SWDIO: DD1.51 XP4.1 | length 12.7
  Top Layer w0.4: XP4.1@5.22,-6.025 7.449,-8.254 15.161,-8.254 15.95,-9.043 DD1.51
USB_DM: DD1.48 XS1.2 | length 8.8
  Top Layer w0.3: DD1.48 17.75,-9.15 cw(c18.85,-9.15) 18.85,-8.05 ccw(c18.85,-7.175) 19.725,-7.175 XS1.2
USB_DP: DD1.49 XS1.3 | length 8.7
  Top Layer w0.3: DD1.49 17.15,-8.525 cw(c18.2,-8.525) 18.2,-7.475 ccw(c18.2,-6.6) 19.075,-6.6 XS1.3
VDD33: C5.2 C7.1 DA2.1 DA2.2 DD1.43 DD1.44 R4.1 XP4.3 | length 19.1
  Top Layer w0.25: R4.1 25.636,-11.325 25.896,-11.585 DA2.2
  Top Layer w0.5: v3(21.25,-11.34) C7.1 C5.2 24.308,-11.332 25.617,-11.332 R4.1
  Bottom Layer w0.5: XP4.3 12.775,-8.375 18.285,-8.375 v3(21.25,-11.34)
pads on no net: DD1.27 DD1.28 DD1.29 DD1.30 DD1.36 DD1.45 DD1.52 DD1.53 DD1.54 DD1.55 DD1.56 DD1.59 DD1.60

## Polygon pours and split planes (outlines as drawn)
GND on Top Layer "GND_L01_P000" (solid, pour order 0): -1.5,-38 cw(c-1.5,-36.5) -3,-36.5 -3,1.5 cw(c-1.5,1.5) -1.5,3 35.25,3 cw(c35.25,1.5) 36.75,1.5 36.75,-19.5 cw(c35.25,-19.5) 35.25,-21 29.2,-21 ccw(c29.2,-22.5) 27.7,-22.5 27.7,-36.5 cw(c26.2,-36.5) 26.2,-38
GND on Bottom Layer "GND_L02_P001" (solid, pour order 1): -1.5,-38 cw(c-1.5,-36.5) -3,-36.5 -3,1.5 cw(c-1.5,1.5) -1.5,3 35.25,3 cw(c35.25,1.5) 36.75,1.5 36.75,-19.5 cw(c35.25,-19.5) 35.25,-21 29.2,-21 ccw(c29.2,-22.5) 27.7,-22.5 27.7,-36.5 cw(c26.2,-36.5) 26.2,-38

## Other copper
Top Layer:
  rectangle net VDD33: 20.65,-11.65 21.85,-10.95
  rectangle net VDD33: 26.66,-11.585 27.42,-11.085
  rectangle net ACC_V: 29.43,-12.085 30.19,-11.085

## Silkscreen, mask and mechanical layers (free items; w line width, h text height)
Top Overlay:
  text "TX  RX" at -2.025,-3.8 h1.5
  text "SWDIO" at 5.989,-4.05 h1.5 r90
  text "SWCLK" at 8.281,-4.05 h1.5 r90
  text "3.3V" at 10.572,-4.05 h1.5 r90
  text "GND" at 12.864,-4.05 h1.5 r90
  text "PC0 PB1" at 3.1,-9.59 h1.3
  text "PC1 PB0" at 3.1,-12.135 h1.3
  text "PC2 PC5" at 3.1,-14.68 h1.3
  text "PC3 PC4" at 3.1,-17.225 h1.3
  text "PA0 PA3" at 3.1,-19.77 h1.3
  text "PC6 PA2" at 3.1,-22.315 h1.3
  text "CS" at 8.539,-31.197 h1.5 r90
  text "SCL" at 21.514,-31.88 h1.5 r90
  text "SCK" at 11.134,-31.918 h1.5 r90
  text "SDA" at 18.919,-31.961 h1.5 r90
  text "MOSI" at 16.324,-32.603 h1.5 r90
  text "MISO" at 13.729,-32.675 h1.5 r90
Board Outline:
  the board outline again, w0.1
Board Information:
  lines w0.25: -16.075,-38 3.255,-38 ; -16.075,3 3.255,3 ; -3,-0.131 -3,19.199 ; 37,-0.131 37,19.199